# EAGLE board colorsensor (EAGLE 7.2.0)
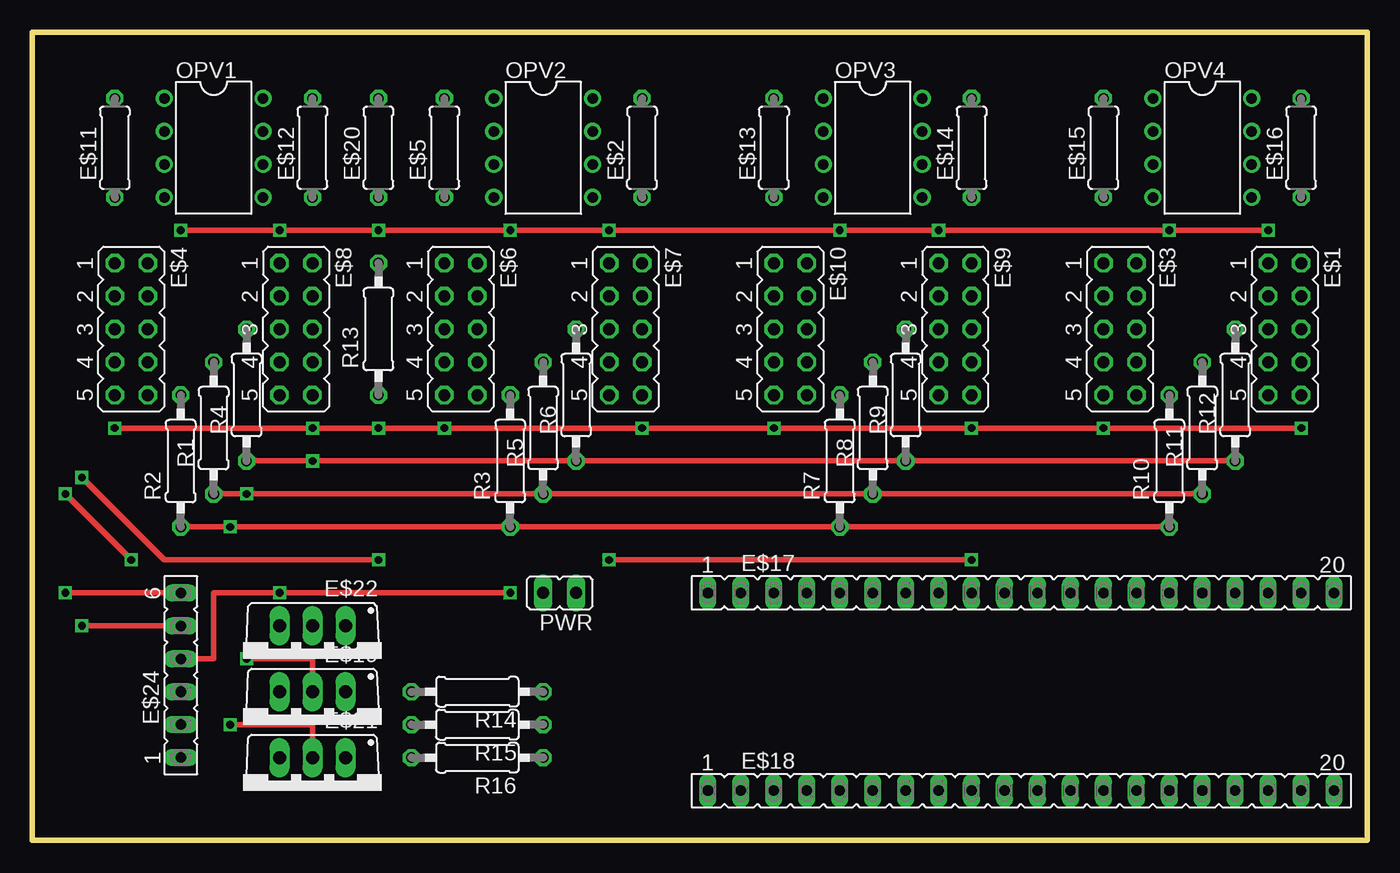
[diagram p0: board, top side]
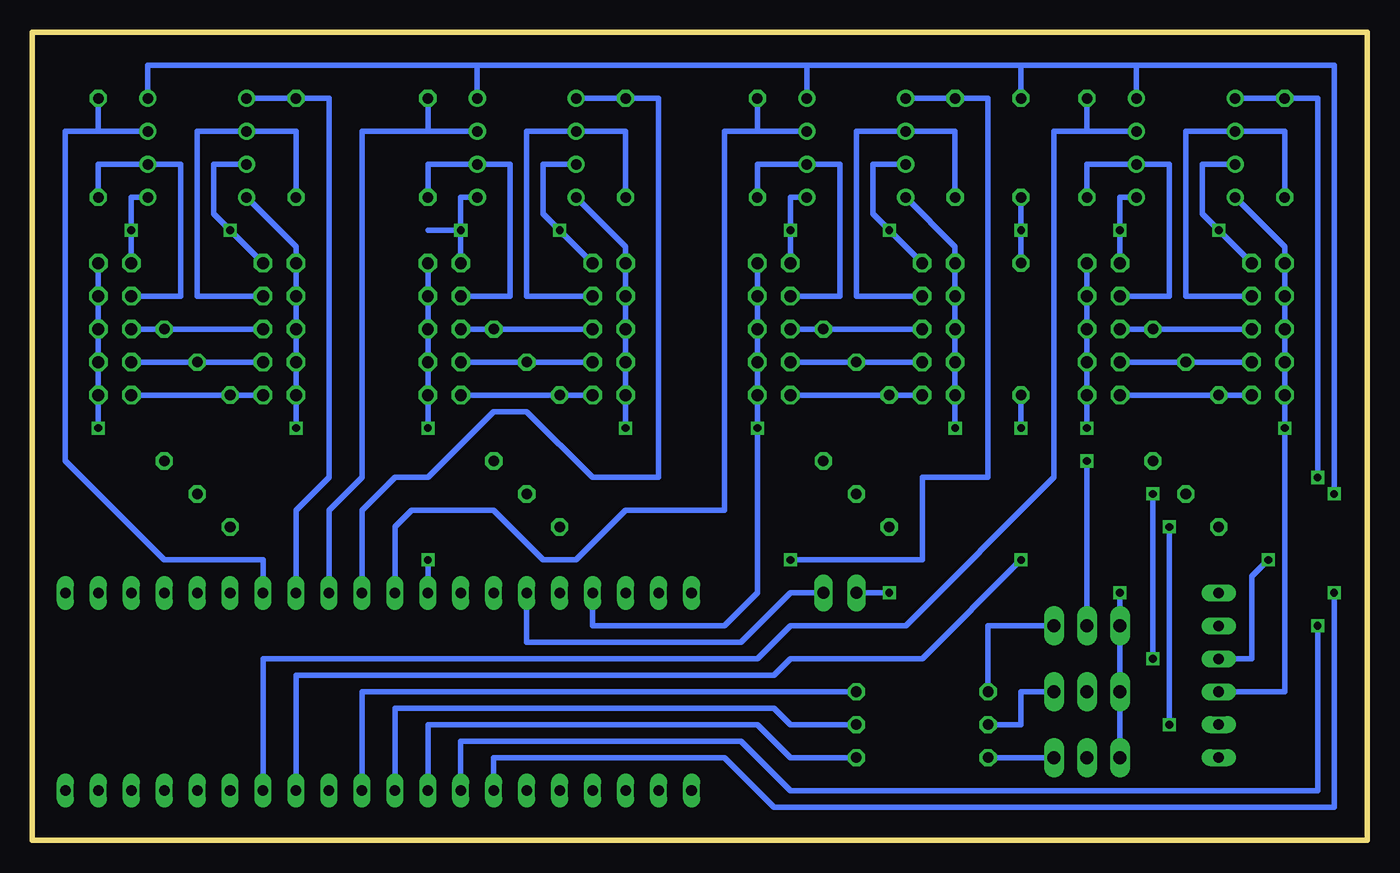
[diagram p1: board, bottom side, seen from below]

Size 102.87 x 62.23 mm. Coordinates in mm from the lower left corner, seen from the top.
Outline: 0,0 0,62.23 102.87,62.23 102.87,0 0,0
Copper layers (1*16): Top 0.035mm / dielectric 1.5mm / Bottom 0.035mm
Design rules "default *": minimum track width 10mil, minimum drill 12mil, track to track 8mil, track to pad 8mil, pad to pad 8mil, via to via 8mil, smd to smd 8mil, copper to edge 40mil, drill to drill 8mil, minimum pad ring 10mil, minimum via ring 8mil, stop-mask expansion 4mil, vias tented up to drill 0mil, thermal gap 10mil

## Footprints (pad centres in the part's own frame; a part is rotated, then mirrored left to right if it is on the bottom)
JP5Q = drill 0.914 octagon: 1 -5.08,-1.27; 2 -5.08,1.27; 3 -2.54,-1.27; 4 -2.54,1.27; 5 0,-1.27; 6 0,1.27; 7 2.54,-1.27; 8 2.54,1.27; 9 5.08,-1.27; 10 5.08,1.27
0207/7 = drill 0.813 octagon: 1 -3.81,0; 2 3.81,0
FE20 = drill 0.813 long: 1 -24.13,0; 2 -21.59,0; 3 -19.05,0; 4 -16.51,0; 5 -13.97,0; 6 -11.43,0; 7 -8.89,0; 8 -6.35,0; 9 -3.81,0; 10 -1.27,0; 11 1.27,0; 12 3.81,0; 13 6.35,0; 14 8.89,0; 15 11.43,0; 16 13.97,0; 17 16.51,0; 18 19.05,0; 19 21.59,0; 20 24.13,0
TO220V = drill 1.016 long: 1 -2.54,-2.54; 2 0,-2.54; 3 2.54,-2.54
FE06 = drill 0.813 long: 1 -6.35,0; 2 -3.81,0; 3 -1.27,0; 4 1.27,0; 5 3.81,0; 6 6.35,0
DIL08 = drill 0.813 pad 1.27: 1 -3.81,-3.81; 2 -1.27,-3.81; 3 1.27,-3.81; 4 3.81,-3.81; 5 3.81,3.81; 6 1.27,3.81; 7 -1.27,3.81; 8 -3.81,3.81
JP1 = drill 0.914 long: 1 0,-1.27; 2 0,1.27
0207/10 = drill 0.813 octagon: 1 -5.08,0; 2 5.08,0

## Placement (x,y rotation side)
E$1  [JP5Q]  96.52,39.37 270 top
E$2  [0207/7]  46.99,53.34 90 top
E$3  [JP5Q]  83.82,39.37 270 top
E$4  [JP5Q]  7.62,39.37 270 top
E$5  [0207/7]  31.75,53.34 90 top
E$6  [JP5Q]  33.02,39.37 270 top
E$7  [JP5Q]  45.72,39.37 270 top
E$8  [JP5Q]  20.32,39.37 270 top
E$9  [JP5Q]  71.12,39.37 270 top
E$10  [JP5Q]  58.42,39.37 270 top
E$11  [0207/7]  6.35,53.34 90 top
E$12  [0207/7]  21.59,53.34 90 top
E$13  [0207/7]  57.15,53.34 90 top
E$14  [0207/7]  72.39,53.34 90 top
E$15  [0207/7]  82.55,53.34 90 top
E$16  [0207/7]  97.79,53.34 90 top
E$17  [FE20]  76.2,19.05 0 top
E$18  [FE20]  76.2,3.81 0 top
E$19  [TO220V]  21.59,8.89 180 top
E$20  2K2  [0207/7]  26.67,53.34 90 top
E$21  [TO220V]  21.59,3.81 180 top
E$22  [TO220V]  21.59,13.97 180 top
E$24  [FE06]  11.43,12.7 90 top
OPV1  [DIL08]  13.97,53.34 270 top
OPV2  [DIL08]  39.37,53.34 270 top
OPV3  [DIL08]  64.77,53.34 270 top
OPV4  [DIL08]  90.17,53.34 270 top
PWR  [JP1]  40.64,19.05 90 top
R1  [0207/10]  13.97,31.75 90 top
R2  [0207/10]  11.43,29.21 90 top
R3  [0207/10]  36.83,29.21 90 top
R4  [0207/10]  16.51,34.29 90 top
R5  [0207/10]  39.37,31.75 90 top
R6  [0207/10]  41.91,34.29 90 top
R7  [0207/10]  62.23,29.21 90 top
R8  [0207/10]  64.77,31.75 90 top
R9  [0207/10]  67.31,34.29 90 top
R10  [0207/10]  87.63,29.21 90 top
R11  [0207/10]  90.17,31.75 90 top
R12  [0207/10]  92.71,34.29 90 top
R13  1K  [0207/10]  26.67,39.37 90 top
R14  10K  [0207/10]  34.29,11.43 180 top
R15  10K  [0207/10]  34.29,8.89 180 top
R16  10K  [0207/10]  34.29,6.35 180 top

## Library data of the parts
E$1 E$3 E$4 E$6-E$10 PWR = jumper
E$2 E$5 E$11-E$16 E$20 R1-R16 = resistor
E$17 E$18 E$24 = con-lsta
E$19 E$21 E$22 = transistor-pnp
OPV1-OPV4 = linear

## Nets
GND: E$1.2 E$1.4 E$1.6 E$1.8 E$1.10 E$3.1 E$3.3 E$3.5 E$3.7 E$3.9 E$4.1 E$4.3 E$4.5 E$4.7 E$4.9 E$6.1 E$6.3 E$6.5 E$6.7 E$6.9 E$7.2 E$7.4 E$7.6 E$7.8 E$7.10 E$8.2 E$8.4 E$8.6 E$8.8 E$8.10 E$9.2 E$9.4 E$9.6 E$9.8 E$9.10 E$10.1 E$10.3 E$10.5 E$10.7 E$10.9 E$17.4 E$24.3 OPV1.4 OPV2.4 OPV3.4 OPV4.4 R13.1
REF: E$1.1 E$3.2 E$4.2 E$6.2 E$7.1 E$8.1 E$9.1 E$10.2 E$20.1 OPV1.3 OPV1.5 OPV2.3 OPV2.5 OPV3.3 OPV3.5 OPV4.3 OPV4.5 R13.2
S$2: E$14.2 E$17.12 OPV3.7
S$3: E$3.4 E$15.1 OPV4.2
S$4: E$1.3 E$16.1 OPV4.6
S$5: E$15.2 E$17.13 OPV4.1
S$6: E$19.2 R1.1 R5.1 R8.1 R11.1
S$7: E$12.2 E$18.14 OPV1.7
S$9: E$5.1 E$6.4 OPV2.2
S$10: E$1.5 E$3.6 R12.2
S$11: E$1.7 E$3.8 R11.2
S$12: E$1.9 E$3.10 R10.2
S$13: E$10.4 E$13.1 OPV3.2
S$14: E$11.2 E$18.13 OPV1.1
S$15: E$4.4 E$11.1 OPV1.2
S$16: E$9.3 E$14.1 OPV3.6
S$17: E$9.5 E$10.6 R9.2
S$18: E$9.7 E$10.8 R8.2
S$19: E$9.9 E$10.10 R7.2
S$22: E$22.1 R14.2
S$23: E$19.1 R15.2
S$24: E$16.2 E$17.14 OPV4.7
S$25: E$21.1 R16.2
S$26: E$4.6 E$8.5 R4.2
S$27: E$17.6 PWR.1
S$28: E$18.8 E$24.5
S$29: E$2.1 E$7.3 OPV2.6
S$30: E$18.7 E$24.6
S$31: E$4.8 E$8.7 R1.2
S$32: E$18.9 R16.1
S$33: E$18.10 R15.1
S$34: E$8.3 E$12.1 OPV1.6
S$35: E$18.11 R14.1
S$36: E$2.2 E$17.10 OPV2.7
S$37: E$13.2 E$17.11 OPV3.1
S$38: E$22.2 R4.1 R6.1 R9.1 R12.1
S$39: E$4.10 E$8.9 R2.2
S$40: E$5.2 E$17.9 OPV2.1
S$41: E$6.6 E$7.5 R6.2
S$42: E$6.8 E$7.7 R5.2
S$43: E$6.10 E$7.9 R3.2
S$45: E$21.2 R2.1 R3.1 R7.1 R10.1
VCC: E$19.3 E$20.2 E$21.3 E$22.3 E$24.4 OPV1.8 OPV2.8 OPV3.8 OPV4.8 PWR.2

## Tracks (layer width: path | path; a pad name or v marks a point on that pad's centre or on a via)
GND  (via drill 0.6)
  Top 0.406: v6.35,31.75 v21.59,31.75 v26.67,31.75 v31.75,31.75 v46.99,31.75 v57.15,31.75 v72.39,31.75 v82.55,31.75 v97.79,31.75
  Bottom 0.406: E$8.2 E$8.4 E$8.6 E$8.8 E$8.10 v21.59,31.75 | v31.75,31.75 E$6.9 E$6.7 E$6.5 E$6.3 E$6.1 31.75,45.72 OPV2.4 | v26.67,31.75 R13.1 | E$7.2 E$7.4 E$7.6 E$7.8 E$7.10 v46.99,31.75 46.99,19.05 49.53,16.51 59.69,16.51 E$17.4 | v57.15,31.75 E$10.9 E$10.7 E$10.5 E$10.3 E$10.1 57.15,45.72 OPV3.4 | v72.39,31.75 E$9.10 E$9.8 E$9.6 E$9.4 E$9.2 | v82.55,31.75 E$3.9 E$3.7 E$3.5 E$3.3 E$3.1 82.55,45.72 OPV4.4 | v97.79,31.75 E$1.10 E$1.8 E$1.6 E$1.4 E$1.2 | OPV1.4 6.35,45.72 E$4.1 E$4.3 E$4.5 E$4.7 E$4.9 v6.35,31.75 6.35,11.43 E$24.3
REF  (via drill 0.6)
  Top 0.406: v11.43,46.99 v19.05,46.99 v26.67,46.99 v36.83,46.99 v44.45,46.99 v62.23,46.99 v69.85,46.99 v87.63,46.99 v95.25,46.99
  Bottom 0.406: OPV2.3 38.1,52.07 38.1,48.26 v36.83,46.99 E$6.2 | R13.2 v26.67,46.99 E$20.1 | OPV1.5 19.05,49.53 v19.05,46.99 E$8.1 | OPV1.3 12.7,52.07 12.7,48.26 v11.43,46.99 E$4.2 | E$7.1 v44.45,46.99 44.45,49.53 OPV2.5 | OPV4.5 95.25,49.53 v95.25,46.99 E$1.1 | OPV4.3 88.9,52.07 88.9,48.26 v87.63,46.99 E$3.2 | OPV3.5 69.85,49.53 v69.85,46.99 | OPV3.3 63.5,52.07 63.5,48.26 v62.23,46.99 E$10.2 | E$9.1 v69.85,46.99 | v69.85,46.99 72.39,46.99
S$2
  Bottom 0.406: 72.39,54.61 E$14.2 | OPV3.7 72.39,54.61 | 72.39,54.61 77.47,54.61 77.47,27.94 80.01,25.4 E$17.12
S$3
  Bottom 0.406: E$3.4 90.17,41.91 90.17,54.61 OPV4.2 82.55,54.61 E$15.1
S$4
  Bottom 0.406: E$1.3 91.44,41.91 91.44,52.07 OPV4.6 97.79,52.07 E$16.1
S$5
  Bottom 0.406: E$17.13 82.55,25.4 80.01,27.94 80.01,57.15 E$15.2 OPV4.1
S$6  (via drill 0.6)
  Top 0.406: R1.1 v16.51,26.67 R5.1 R8.1 R11.1 | v16.51,13.97 21.59,13.97 E$19.2
  Bottom 0.406: v16.51,26.67 v16.51,13.97
S$7
  Bottom 0.406: 21.59,54.61 E$12.2 | OPV1.7 21.59,54.61 | 21.59,54.61 24.13,54.61 24.13,27.94 35.56,16.51 44.45,16.51 46.99,13.97 85.09,13.97 E$18.14
S$9
  Bottom 0.406: E$6.4 39.37,41.91 39.37,54.61 OPV2.2 31.75,54.61 E$5.1
S$10
  Bottom 0.406: E$3.6 R12.2 E$1.5
S$11
  Bottom 0.406: E$3.8 R11.2 E$1.7
S$12
  Bottom 0.406: E$3.10 R10.2 E$1.9
S$13
  Bottom 0.406: E$13.1 57.15,54.61 OPV3.2 64.77,54.61 64.77,41.91 E$10.4
S$14  (via drill 0.6)
  Top 0.406: v26.67,21.59 10.16,21.59 v3.81,27.94
  Bottom 0.406: OPV1.1 E$11.2 3.81,57.15 v3.81,27.94 | E$18.13 82.55,12.7 45.72,12.7 44.45,13.97 34.29,13.97 v26.67,21.59
S$15
  Bottom 0.406: E$4.4 13.97,41.91 13.97,54.61 OPV1.2 6.35,54.61 E$11.1
S$16
  Bottom 0.406: E$9.3 66.04,41.91 66.04,52.07 OPV3.6 72.39,52.07 E$14.1
S$17
  Bottom 0.406: E$10.6 R9.2 E$9.5
S$18
  Bottom 0.406: E$10.8 R8.2 E$9.7
S$19
  Bottom 0.406: E$10.10 R7.2 E$9.9
S$22
  Bottom 0.406: E$22.1 29.21,16.51 R14.2
S$23
  Bottom 0.406: E$19.1 26.67,11.43 26.67,8.89 R15.2
S$24
  Bottom 0.406: E$17.14 85.09,21.59 92.71,21.59 100.33,29.21 100.33,54.61 97.79,54.61 | 97.79,54.61 E$16.2 | OPV4.7 97.79,54.61
S$25
  Bottom 0.406: E$21.1 R16.2
S$26
  Bottom 0.406: E$8.5 R4.2 E$4.6
S$27
  Bottom 0.406: E$17.6 64.77,15.24 48.26,15.24 44.45,19.05 PWR.1
S$28  (via drill 0.6)
  Top 0.406: v3.81,16.51 E$24.5
  Bottom 0.406: E$18.8 69.85,7.62 48.26,7.62 44.45,3.81 3.81,3.81 v3.81,16.51
S$29
  Bottom 0.406: E$7.3 40.64,41.91 40.64,52.07 OPV2.6 46.99,52.07 E$2.1
S$30  (via drill 0.6)
  Top 0.406: v2.54,19.05 E$24.6
  Bottom 0.406: E$18.7 67.31,6.35 49.53,6.35 45.72,2.54 2.54,2.54 v2.54,19.05
S$31
  Bottom 0.406: E$4.8 R1.2 E$8.7
S$32
  Bottom 0.406: E$18.9 72.39,8.89 46.99,8.89 44.45,6.35 R16.1
S$33
  Bottom 0.406: E$18.10 74.93,10.16 45.72,10.16 44.45,8.89 R15.1
S$34
  Bottom 0.406: E$8.3 15.24,41.91 15.24,52.07 OPV1.6 21.59,52.07 E$12.1
S$35
  Bottom 0.406: E$18.11 77.47,11.43 R14.1
S$36
  Bottom 0.406: E$17.10 74.93,24.13 73.66,25.4 67.31,25.4 63.5,21.59 60.96,21.59 57.15,25.4 49.53,25.4 49.53,54.61 46.99,54.61 | E$2.2 46.99,54.61 | 46.99,54.61 OPV2.7
S$37
  Bottom 0.406: E$17.11 77.47,25.4 74.93,27.94 72.39,27.94 67.31,33.02 64.77,33.02 59.69,27.94 54.61,27.94 54.61,57.15 E$13.2 OPV3.1
S$38  (via drill 0.6)
  Top 0.406: R12.1 R9.1 R6.1 v21.59,29.21 R4.1
  Bottom 0.406: E$22.2 v21.59,29.21
S$39
  Bottom 0.406: E$4.10 R2.2 E$8.9
S$40  (via drill 0.6)
  Top 0.406: v72.39,21.59 v44.45,21.59
  Bottom 0.406: E$17.9 v72.39,21.59 | v44.45,21.59 34.29,21.59 34.29,27.94 29.21,27.94 29.21,57.15 E$5.2 OPV2.1
S$41
  Bottom 0.406: E$6.6 R6.2 E$7.5
S$42
  Bottom 0.406: E$6.8 R5.2 E$7.7
S$43
  Bottom 0.406: E$6.10 R3.2 E$7.9
S$45  (via drill 0.6)
  Top 0.406: R2.1 v15.24,24.13 R3.1 R7.1 R10.1 | v15.24,8.89 21.59,8.89 E$21.2
  Bottom 0.406: v15.24,8.89 v15.24,24.13
VCC  (via drill 0.6)
  Top 0.406: v7.62,21.59 v2.54,26.67 | v36.83,19.05 v19.05,19.05 13.97,19.05 13.97,13.97 E$24.4
  Bottom 0.406: OPV4.8 93.98,59.69 68.58,59.69 | OPV3.8 68.58,59.69 | 43.18,59.69 68.58,59.69 | 43.18,59.69 OPV2.8 | 43.18,59.69 26.67,59.69 | 26.67,59.69 17.78,59.69 | 17.78,59.69 2.54,59.69 v2.54,26.67 | 17.78,59.69 OPV1.8 | E$20.2 26.67,59.69 | E$21.3 E$19.3 E$22.3 v19.05,19.05 | v36.83,19.05 PWR.2 | E$24.4 8.89,13.97 8.89,20.32 v7.62,21.59